# Altium PCB IrDA2TTLBoard.PcbDoc
Units mm, origin at the board's own origin, x right, y up, seen from the top; angles counter-clockwise.
Board outline 29 x 19 mm, 2 copper layers (Top Layer, Bottom Layer), stack 1.571 mm thick; 16 components, 14 nets, 55 pads, 202 vias.
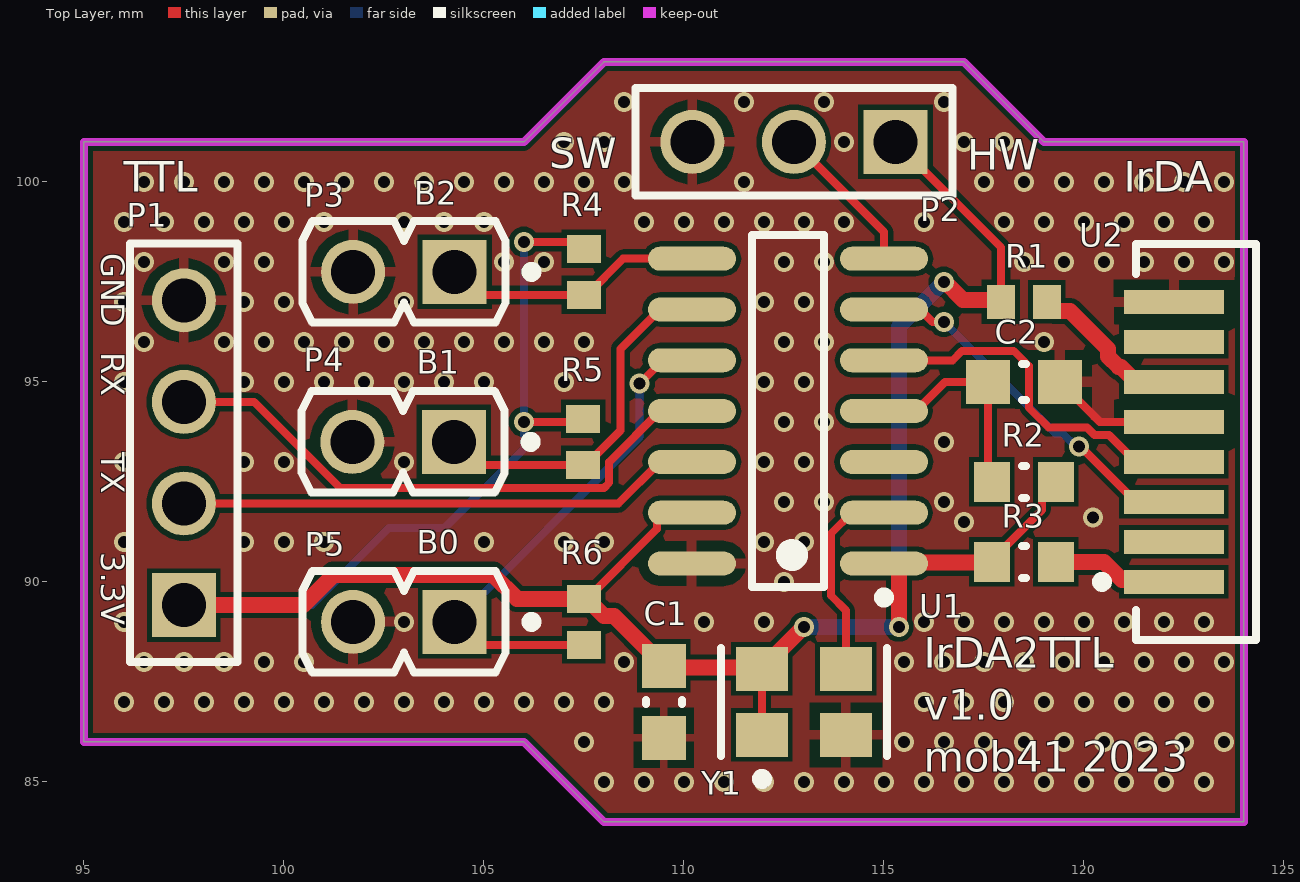
[diagram p0: Top Layer view]
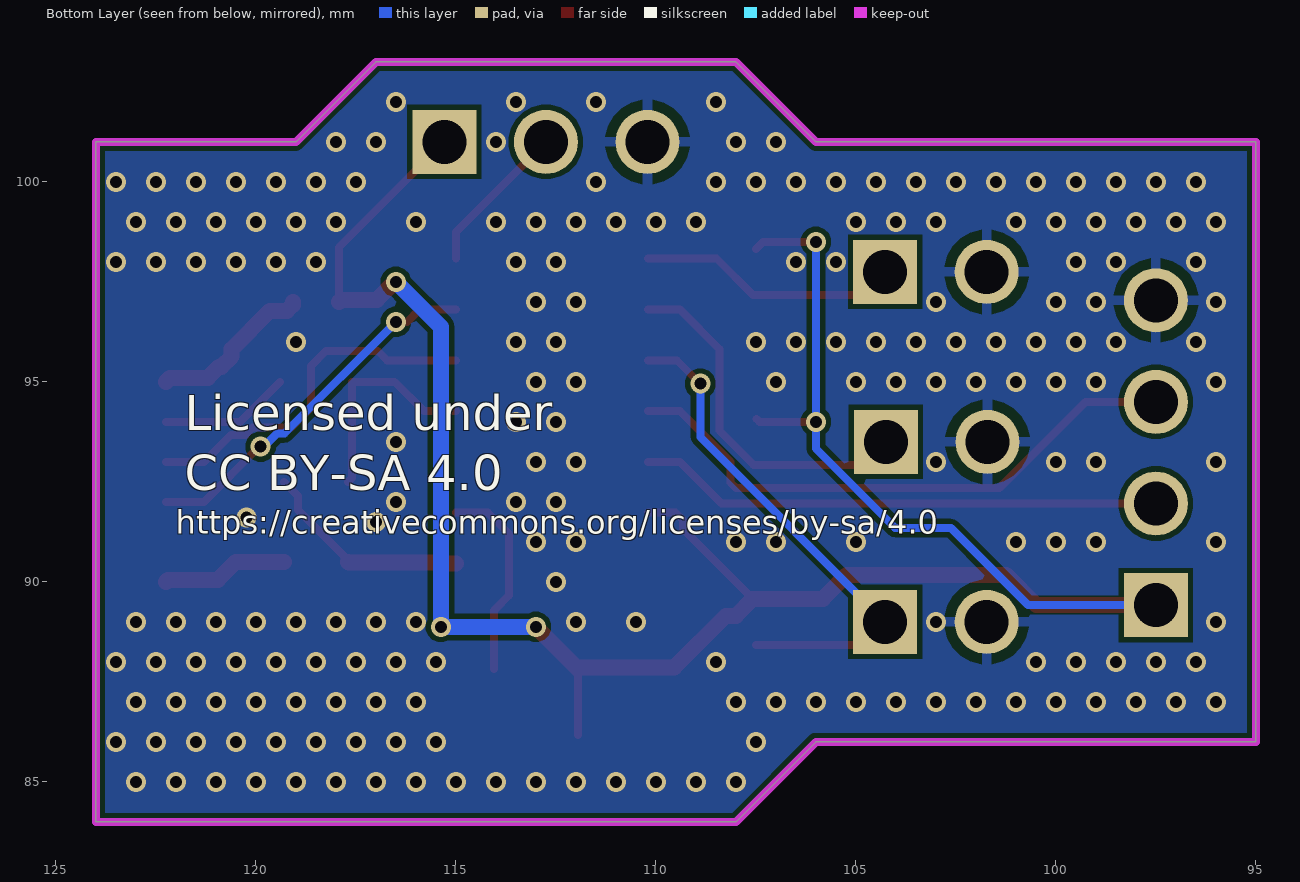
[diagram p1: Bottom Layer view, seen from below]

## Layer stack, top to bottom
Top Solder: solder mask 0.0102, Solder Resist, Dk 3.5
Top Layer: signal copper 0.0356
Dielectric 1: dielectric 1.5, FR-4, Dk 4.8
Bottom Layer: signal copper 0.0356
Bottom Solder: solder mask 0.0102, Solder Resist, Dk 3.5

## Board outline
95,86 106,86 108,84 124,84 124,101 119,101 117,103 108,103 106,101 95,101

## Design rules (kind name [scope] priority, off if disabled: settings)
Clearance [All] p1: gap=0.127 ignorepadtopadclearanceinfootprint=FALSE
DiffPairsRouting [All] p1: maxlimit=1 minlimit=0.127 mostfreqgap=0.2 toplayer_minwidth=0.127 toplayer_maxwidth=0.2 toplayer_prefwidth=0.2 bottomlayer_minwidth=0.127 bottomlayer_maxwidth=0.2 bottomlayer_prefwidth=0.2 maxuncoupledlength=12.7
Height [All] p1: minheight=0 maxheight=500 prefheight=12.7
HoleSize [All] p1: absolutevalues=TRUE maxlimit=6.3 minlimit=0.025 maxpercent=80.000 minpercent=20.000
MinimumSolderMaskSliver [All] p1: minsoldermaskwidth=0.04
PolygonConnect CertainComponents [InComponent('C1') vs InNet('GND')] p1: connectstyle=Relief reliefconductorwidth=0.2 reliefentries=4 polygonreliefangle="90 Angle" airgapwidth=0.2 // force certain component to be conencted with relieft connection
PolygonConnect GND_VIA [InNet('GND') and IsVia = true] p2: connectstyle=Direct reliefconductorwidth=0.254 reliefentries=4 polygonreliefangle="90 Angle" airgapwidth=0.254
PolygonConnect GND_PAD [InNet('GND')] p3: connectstyle=Relief reliefconductorwidth=0.254 reliefentries=4 polygonreliefangle="90 Angle" airgapwidth=0.254
PolygonConnect [All] p4: connectstyle=Direct reliefconductorwidth=0.3 reliefentries=4 polygonreliefangle="90 Angle" airgapwidth=0.127
RoutingVias [All] p1: holewidth=0.3 width=0.5 viastyle="Through Hole" minholewidth=0.3 minwidth=0.5 maxholewidth=6 maxwidth=6.3
SilkToSilkClearance [All] p1: silktosilkclearance=0.04
SilkToSolderMaskClearance [IsPad] p1: minsilkscreentomaskgap=0.04 clearancetoexposedcopper=TRUE
SolderMaskExpansion [All] p1: expansion=0.102 istentingtop=FALSE
Width [All] p1: maxlimit=1 minlimit=0.127 preferedwidth=0.2
24 further rules are at their usual default settings.

## Components (designator, comment, footprint, x,y, rotation, side; value= is the part's Value field where it differs from the comment)
C1 "CAP 100nF 6.3V 0603(1608)" CAPC0603(1608)100_M 109.5,87 r90 top value=100nF
C2 "CAP 100nF 6.3V 0603(1608)" CAPC0603(1608)100_M 118.5,95 r180 top value=100nF
P1 "61300411121" 61300411121 97.5,93.23 r90 top
P2 "61300311121" 61300311121 112.75,101 r180 top
P3 "613 002 111 21" WE-61300211121_V 103,97.75 r180 top
P4 "613 002 111 21" WE-61300211121_V 102.98,93.5 r180 top
P5 "613 002 111 21" WE-61300211121_V 103,89 r180 top
R1 "CRCW060347R0FKEA" RESC1609X50X30LL10T20 118.5,97 r180 top value=47R
R2 "10K 1% 0603(1608)" RESC0603(1608)_N 118.5,92.5 r0 top value="10000.00 Ohm"
R3 "10K 1% 0603(1608)" RESC0603(1608)_N 118.5,90.5 r180 top value="10000.00 Ohm"
R4 "CRCW0603100KJNEA" RESC1609X50X30LL10T20 107.5,97.75 r90 top value=100k
R5 "CRCW0603100KJNEA" RESC1609X50X30LL10T20 107.48,93.5 r90 top value=100k
R6 "CRCW0603100KJNEA" RESC1609X50X30LL10T20 107.5,89 r90 top value=100k
U1 "MCP2120-I/SL" SOIC-SL14_N 112.6,94.27 r180 top
U2 "TFDU4101-TR3" VISH-TFDU4100_4101-TR3_V 122.25,93.5 r90 top
Y1 "ASE-7.3728MHZ-LC-T" FP-ASE-MFG 113,87 r0 top

## Footprints (in the part's own frame and the unit in brackets; to place one, negate y for a bottom-side part, rotate by r counter-clockwise, add the part's x,y. Pads: shape width x height; smd on the part's side, far side on the other; paste and mask are expansions set on the pad)
61300311121 [mm] "Pin Header, pitch 2.54 mm, THT, Vertical, single row, 3p"
  rect 1.6x1.6 hole 1.1: 1(-2.54,0)
  round 1.6 hole 1.1: 2(0,0) 3(2.54,0)
  silkscreen extent -3.96,-1.35 3.96,1.35, body extent -3.81,-1.27 3.81,1.27, height 8.57
61300411121 [mm] "Pin Header, pitch 2.54 mm, THT, Vertical, single row, 4p"
  rect 1.6x1.6 hole 1.1: 1(-3.81,0)
  round 1.6 hole 1.1: 2(-1.27,0) 3(1.27,0) 4(3.81,0)
  silkscreen extent -5.23,-1.35 5.23,1.35, body extent -5.08,-1.27 5.08,1.27, height 8.57
CAPC0603(1608)100_M [mm] "Chip Capacitor, Body 1.6x0.8mm, Height 1.0mm, IPC Low Density"
  rect 1.1x1.1 smd: 1(-0.9,0) 2(0.9,0)
  silkscreen extent -0.05,-0.45 0.05,0.45, body extent -0.87,-0.47 0.88,0.48, height 1
FP-ASE-MFG [mm]
  rect 1.3x1.1 smd paste+0 mask+0: 1(-1.05,-0.825) 2(1.05,-0.825) 3(1.05,0.825) 4(-1.05,0.825)
  silkscreen extent -2.07,-2.05 2.07,1.35, body extent -1.8,-1.48 1.8,1.48, height 0.25
RESC0603(1608)_N [mm] "Chip Resistor, Body 1.6x0.8mm, IPC Medium Density"
  rect 0.9x1 smd: 1(-0.8,0) 2(0.8,0)
  silkscreen extent -0.05,-0.4 0.05,0.4, body extent -0.85,-0.47 0.85,0.47, height 0.6
RESC1609X50X30LL10T20 [mm] "Chip Resistor, 2-Leads, Body 1.55x0.85mm, IPC High Density"
  rect 0.7x0.85 smd: 1(-0.575,0) 2(0.575,0)
  body extent -0.82,-0.48 0.82,0.48, height 0.5
SOIC-SL14_N [mm] "SOIC, 14-Leads, Body 8.7x3.9mm, Pitch 1.27mm, IPC Medium Density"
  oval 2.2x0.6 smd: 1(-2.4,3.81) 2(-2.4,2.54) 3(-2.4,1.27) 4(-2.4,0) 5(-2.4,-1.27) 6(-2.4,-2.54) 7(-2.4,-3.81) 8(2.4,-3.81) 9(2.4,-2.54) 10(2.4,-1.27) 11(2.4,0) 12(2.4,1.27) 13(2.4,2.54) 14(2.4,3.81)
  silkscreen extent -2.53,-4.4 0.9,4.78, body extent -2,-4.38 2,4.38, height 1.75
VISH-TFDU4100_4101-TR3_V [mm] "SMD Side View, 8-Leads, Body 9.9x4.7x4.2mm, Pitch 1mm"
  rect 0.6x2.5 smd: 1(-3.5,0) 2(-2.5,0) 3(-1.5,0) 4(-0.5,0) 5(0.5,0) 6(1.5,0) 7(2.5,0) 8(3.5,0)
  silkscreen extent -4.95,-2.05 4.95,1.92, body extent -4.95,-3.74 4.95,0.95, height 4.2
WE-61300211121_V [mm] "Header, 2-Leads, Body 5.08x2.54mm, Pitch 2.54mm"
  rect 1.6x1.6 hole 1.1: 1(-1.27,0)
  round 1.6 hole 1.1: 2(1.27,0)
  silkscreen extent -3.31,-1.27 2.54,1.27, body extent -2.54,-1.27 2.54,1.27, height 8.54

## Part data
C1 C2: library part CMP-1035-02576-1, "CAP 100nF 6.3V ±10% 0603 (1608 Metric) Thickness 1mm SMD", Case-EIA=0603, Case-Metric=1608, Rated Voltage="6.3 V", Tolerance=Â±10%, Max Thickness="1 mm", Technology=SMT
P1: library part CMP-1502-01064-1, "THT Vertical Pin Header WR-PHD, Pitch 2.54 mm, Single Row, 4 pins", Contact Resistance=20mOhm, Manufacturer="Wurth Elektronik", Operating Temperature=-40to105degC, Rated Current=3A, Withstanding Voltage=500VAC, Working Voltage=250VAC, Datasheet URL=https://katalog.we-online.de/em/datasheet/6130xx11121.pdf, Gender=Male, Manufacturer URL=http://www.we-online.de, Mounting Technology=THT, Orientation=Vertical, Package Reference=61300411121, Packaging=Bag, Part Number=61300411121, Pin Number=4, Pitch=2.54mm, Publisher=WurthElektronik, Row Number=Single
P2: library part CMP-1502-01062-1, "THT Vertical Pin Header WR-PHD, Pitch 2.54 mm, Single Row, 3 pins", Contact Resistance=20mOhm, Manufacturer="Wurth Elektronik", Operating Temperature=-40to105degC, Rated Current=3A, Withstanding Voltage=500VAC, Working Voltage=250VAC, Datasheet URL=https://katalog.we-online.de/em/datasheet/6130xx11121.pdf, Gender=Male, Manufacturer URL=http://www.we-online.de, Mounting Technology=THT, Orientation=Vertical, Package Reference=61300311121, Packaging=Bag, Part Number=61300311121, Pin Number=3, Pitch=2.54mm, Publisher=WurthElektronik, Row Number=Single
P3 P4 P5: library part CMP-1712-00002-3, "Male Header, Pitch 2.54 mm, 1 x 2 Position, Height 8.54 mm, Tail Length 3 mm, -40 to 105 degC, RoHS, Bulk", Max Operating Temperature="125 degC", Min Operating Temperature="-40 degC", ComponentLink1Description="Manufacturer URL", ComponentLink1URL=https://www.we-online.com/, ComponentLink2Description=Datasheet, ComponentLink2URL=http://katalog.we-online.de/em/datasheet/6130xx11121.pdf, DatasheetVersion="Rev. J", Mount="Through Hole", Mounting Technology="Through Hole", PackageDescription="Male Header, Pitch 2.54 mm, 1 x 2 Position, Height 8.54 mm, Tail Length 3 mm", Packaging=Bulk, PartNumber="613 002 111 21", Pins=2, REACH SVHC="No SVHC", RoHSCompliant=True
R1: library part CMP-2000-03383-1, Manufacturer="Vishay Dale", Part Number=CRCW060347R0FKEA
R2 R3: library part CMP-1012-00623-1, "10K 0.1W 1% 0603 (1608 Metric)  SMD", Case-EIA=0603, Case-Metric=1608, Power="0.1 W", Tolerance="1 %", Technology=SMT
R4 R5 R6: library part CMP-2000-03823-1, Manufacturer="Vishay Dale", Part Number=CRCW0603100KJNEA
U1: library part CMP-0186-00156-2, "Infrared Encoder/Decoder, 14-Pin SOIC, Industrial Temperature", Code_IPC=SOIC127P600-14, Code_JEDEC=MS-012-AB, ComponentLink1Description="Manufacturer URL", ComponentLink1URL=http://www.microchip.com/, ComponentLink2Description=Datasheet, ComponentLink2URL=http://ww1.microchip.com/downloads/en/DeviceDoc/21618b.pdf, ComponentLink3Description="Package Specification", ComponentLink3URL=http://www.microchip.com/stellent/groups/techpub_sg/documents/packagingspec/en012702.pdf, DatasheetVersion="revB, Feb-2007", PackageDescription="14-Lead Plastic Small Outline (SL) - Narrow, 3.90mm Body [SOIC]", PackageReference=SOIC-SL14, PackageVersion="revBB, Aug-2009", RevisionNote="URLs added."
U2: library part CMP-0726-00002-1, "Infrared Transceiver Module, SIR, 115.2 kbit/s, 2.4 to 5.5 V, -30 to 85 degC, 9.9 x 4.7 x 4.2 mm SMD Side View, RoHS, Tape and Reel", Ambient Temperature Range="-30 to 85 degC", Idle Supply Current="0.07 mA", Manufacturer="Vishay Semiconductor", Operating Voltage="2.4 to 5.5 V", ComponentLink1Description="Manufacturer URL", ComponentLink1URL=http://www.vishay.com/, ComponentLink2Description=Datasheet, ComponentLink2URL=http://www.vishay.com/docs/81288/tfdu4101.pdf, ComponentLink3Description="Package Specification", ComponentLink3URL=http://www.vishay.com/docs/81288/tfdu4101.pdf, Data Rate="115.2 kbit/s", DatasheetVersion="Rev. 1.6", IRDA Std.=SIR, Link Distance="0 to >=1 m", Mounting Technology="Surface Mount", PackageDescription="8-Pin SMD Side View, Body 9.9 x 4.7 x 4 mm, Pitch 1 mm", PackageReference=TFDU4100_4101-TR3, PackageVersion=Rev.1.6, Packing="Tape and Reel", PartNumber=TFDU4101-TR3, RoHS=TRUE
Y1: library part CMP-27762-000889-1, "XTAL Oscillator 7.3728MHz ±50ppm CMOS 3.3V 4-SMD 3.2mm x 2.5mm", Case/Package=SMD/SMT, Frequency=7.3728MHz, Frequency Stability=50ppm, Load Capacitance=15pF, Max Operating Temperature=85°C, Max Supply Current=7mA, Max Supply Voltage=3.465V, Min Operating Temperature=-40°C, Min Supply Voltage=3.135V, Operating Frequency="7.3728 MHz", Operating Supply Voltage=3.3V, Package Quantity=1000, Depth=2.5mm, Height=0.047inch, Lead Free="Lead Free", Length=3.2mm, Mount="Surface Mount", Number of Pins=4, Packaging="Tape and Reel", Radiation Hardening=No, REACH SVHC="No SVHC", Series=ASE, Termination=SMD/SMT, Width=0.098inch

## Via types
v1: diameter 0.5, hole 0.3, Top Layer to Bottom Layer, tented both sides, 202 vias

## Nets (pads, with @x,y where several pads share a name; then routed paths per layer and width w, separated by ;. In a path a pad name is that pad's centre, name@x,y a point inside that pad or via, vN(x,y) a via of type N, cw(c..) or ccw(c..) an arc to the next point about the centre after c; other vN are vias at no path point)
33V: C1.2 P1.1 P2.1 R1.2 R2.2 R3.2 R4.2 R5.2 R6.2 U1.1 U1.13 Y1.1 Y1.4 | length 66
  Top Layer w0.2: v1(106,94) 107.405,94 R5.2 ; v1(106,98.5) 107.325,98.5 R4.2 ; R6.2 107.575,89.575 109.323,91.323 109.323,91.545 109.508,91.73 U1.13 ; Y1.1 Y1.4 ; P2.1 117.925,98.365 R1.2@117.925,97.075 ; R3.2 117.7,90.55 118.95,91.8 118.95,92.15 R2.2
  Top Layer w0.4: P1.1 100.485,89.42 101.242,90.177 105.226,90.177 105.828,89.575 R6.2 ; R6.2@107.575,89.575 107.998,89.152 108.248,89.152 109.537,87.863 111.912,87.863 Y1.4 v1(113,88.875) ; U1.1 115.329,90.46 115.375,90.414 v1(115.375,88.875) ; U1.1@115.329,90.479 117.679,90.479 R3.2 ; v1(116.5,97.5) 116.527,97.5 116.975,97.052 117.873,97.052 R1.2
  Bottom Layer w0.2: P1.1 100.698,89.42 102.623,91.346 104.017,91.346 106,93.329 v1(106,94) v1(106,98.5)
  Bottom Layer w0.4: v1(113,88.875) v1(115.375,88.875) 115.375,96.375 v1(116.5,97.5)
B0: P5.1 R6.1 U1.10 | length 12.9
  Top Layer w0.2: P5.1 104.845,88.425 R6.1 ; v1(108.891,94.954) 109.477,95.54 U1.10
  Bottom Layer w0.2: P5.1 108.891,93.621 v1(108.891,94.954)
B1: P4.1 R5.1 U1.9 | length 9
  Top Layer w0.2: P4.1 104.825,92.925 107.555,92.925 108.414,93.784 108.414,95.824 109.4,96.81 U1.9
B2: P3.1 R4.1 U1.8 | length 6.5
  Top Layer w0.2: P3.1 104.845,97.175 R4.1 107.575,97.175 108.48,98.08 U1.8
CLK_OUT: U1.2 Y1.3 | length 5.1
  Top Layer w0.2: Y1.3 114.05,89.288 113.673,89.665 113.673,91.203 114.2,91.73 U1.2
GND: C1.1 C2.1 P1.4 P2.3 P3.2 P4.2 P5.2 U1.14 U2.5 U2.8 Y1.2 | length 3.3
  Top Layer w0.2: C2.1 120.4,94 U2.5
  other v1: 108,85 109,85 110,85 111,85 112,85 113,85 114,85 115,85 116,85 117,85 118,85 119,85 120,85 121,85 122,85 123,85 107.5,86 115.5,86 116.5,86 117.5,86 118.5,86 119.5,86 120.5,86 121.5,86 122.5,86 123.5,86 96,87 97,87 98,87 99,87 100,87 101,87 102,87 103,87 104,87 105,87 106,87 107,87 108,87 116,87 117,87 118,87 119,87 120,87 121,87 122,87 123,87 96.5,88 97.5,88 98.5,88 99.5,88 100.5,88 108.5,88 115.5,88 116.5,88 117.5,88 118.5,88 119.5,88 120.5,88 121.5,88 122.5,88 123.5,88 96,89 103,89 110.5,89 112,89 116,89 117,89 118,89 119,89 120,89 121,89 122,89 123,89 112.5,90 96,91 99,91 100,91 101,91 105,91 107,91 108,91 112,91 113,91 117,91.5 120.231,91.609 112.5,92 113.5,92 116.5,92 96,93 99,93 100,93 103,93 112,93 113,93 116.5,93.5 112.5,94 113.5,94 96,95 99,95 100,95 101,95 102,95 103,95 104,95 105,95 107,95 112,95 113,95 96.5,96 98.5,96 99.5,96 100.5,96 101.5,96 102.5,96 103.5,96 104.5,96 105.5,96 106.5,96 107.5,96 112.5,96 113.5,96 119,96 96,97 99,97 100,97 103,97 112,97 113,97 96.5,98 98.5,98 99.5,98 105.5,98 106.5,98 112.5,98 113.5,98 118.5,98 119.5,98 120.5,98 121.5,98 122.5,98 123.5,98 96,99 97,99 98,99 99,99 100,99 101,99 103,99 104,99 105,99 109,99 110,99 111,99 112,99 113,99 114,99 116,99 118,99 119,99 120,99 121,99 122,99 123,99 96.5,100 97.5,100 98.5,100 99.5,100 100.5,100 101.5,100 102.5,100 103.5,100 104.5,100 105.5,100 106.5,100 107.5,100 108.5,100 111.5,100 117.5,100 118.5,100 119.5,100 120.5,100 121.5,100 122.5,100 123.5,100 107,101 108,101 114,101 117,101 118,101 108.5,102 111.5,102 113.5,102 116.5,102
MODE: P2.2 U1.7 | length 3.9
  Top Layer w0.2: P2.2 115,98.75 U1.7
NetC2_2: C2.2 R2.1 U1.4 | length 5.4
  Top Layer w0.2: U1.4 115.8,94.27 116.53,95 C2.2 117.6,92.6 R2.1
NetR1_1: R1.1 U2.6 | length 4.2
  Top Layer w0.4: R1.1 119.075,96.925 119.225,96.775 119.65,96.775 120.604,95.821 120.604,95.634 120.865,95.373 120.927,95.373 121.2,95.1 122.15,95.1 U2.6
NetR3_1: R3.1 U2.1 | length 3.2
  Top Layer w0.4: R3.1 120.5,90.5 120.95,90.05 122.2,90.05 U2.1
NetU1_5: U1.5 U2.4 | length 9.1
  Top Layer w0.2: U1.5 116.719,95.54 116.956,95.777 118.244,95.777 118.623,95.398 118.623,94.356 119.12,93.858 120.079,93.858 120.265,93.673 120.627,93.673 121.3,93 U2.4
NetU1_6: U1.6 U2.3 | length 9.2
  Top Layer w0.2: U1.6 115.908,96.81 116.218,96.5 v1(116.5,96.5) ; v1(119.881,93.381) 119.919,93.381 121.3,92 U2.3
  Bottom Layer w0.2: v1(116.5,96.5) 119.29,93.71 119.472,93.71 119.8,93.381 v1(119.881,93.381)
RX: P1.3 U1.11 | length 14.7
  Top Layer w0.2: P1.3 99.258,94.5 101.41,92.348 107.999,92.348 108.132,92.481 108.132,93 109.402,94.27 U1.11
TX: P1.2 U1.12 | length 13.1
  Top Layer w0.2: P1.2 108.36,91.96 109.4,93 U1.12
pads on no net: U1.3 U2.2 U2.7

## Polygon pours and split planes (outlines as drawn)
GND on Top Layer "GND_L01_P000" (solid, pour order 0): 95,86 106,86 108,84 124,84 124,101 119,101 117,103 108,103 106,101 95,101
GND on Bottom Layer "GND_L02_P001" (solid, pour order 1): 95,86 106,86 108,84 124,84 124,101 119,101 117,103 108,103 106,101 95,101

## Keep-outs
Keep-Out Layer:
  the board outline again, w0.2

## Silkscreen, mask and mechanical layers (free items; w line width, h text height)
Top Overlay:
  text "SW" at 106.629,100.095 h1.3
  text "HW" at 117.084,100.055 h1.3
  text "TTL" at 96,99.5 h1.3
  text "IrDA" at 121,99.5 h1.3
  text "B2" at 103.263,99.234 h1
  text "GND" at 95.234,98.218 h1 r270
  text "RX" at 95.234,95.737 h1 r270
  text "B1" at 103.327,95 h1
  text "TX" at 95.234,93.237 h1 r270
  text "3.3V" at 95.234,90.737 h1 r270
  text "B0" at 103.327,90.5 h1
  text "IrDA2TTL / v1.0 / mob41 2023" at 116,85 h1.3
Bottom Overlay:
  text "Licensed under / CC BY-SA 4.0" at 121.775,92 h1.5
  text "https://creativecommons.org/licenses/by-sa/4.0" at 122,91 h1